# Altium PCB PCB1.PcbDoc (part 2 of 3)
Units mil, origin at the board's own origin, x right, y up, seen from the top; angles counter-clockwise.
Board outline 5410 x 4000 mil, 10 copper layers (Top Layer 1, Top Layer, Layer 5, Layer 3, Layer 1, Layer 2, Layer 4, Layer 6, Bottom Layer, Bottom Layer 1), stack 48.824 mil thick; 53 components, 189 nets, 458 pads, 144 vias.
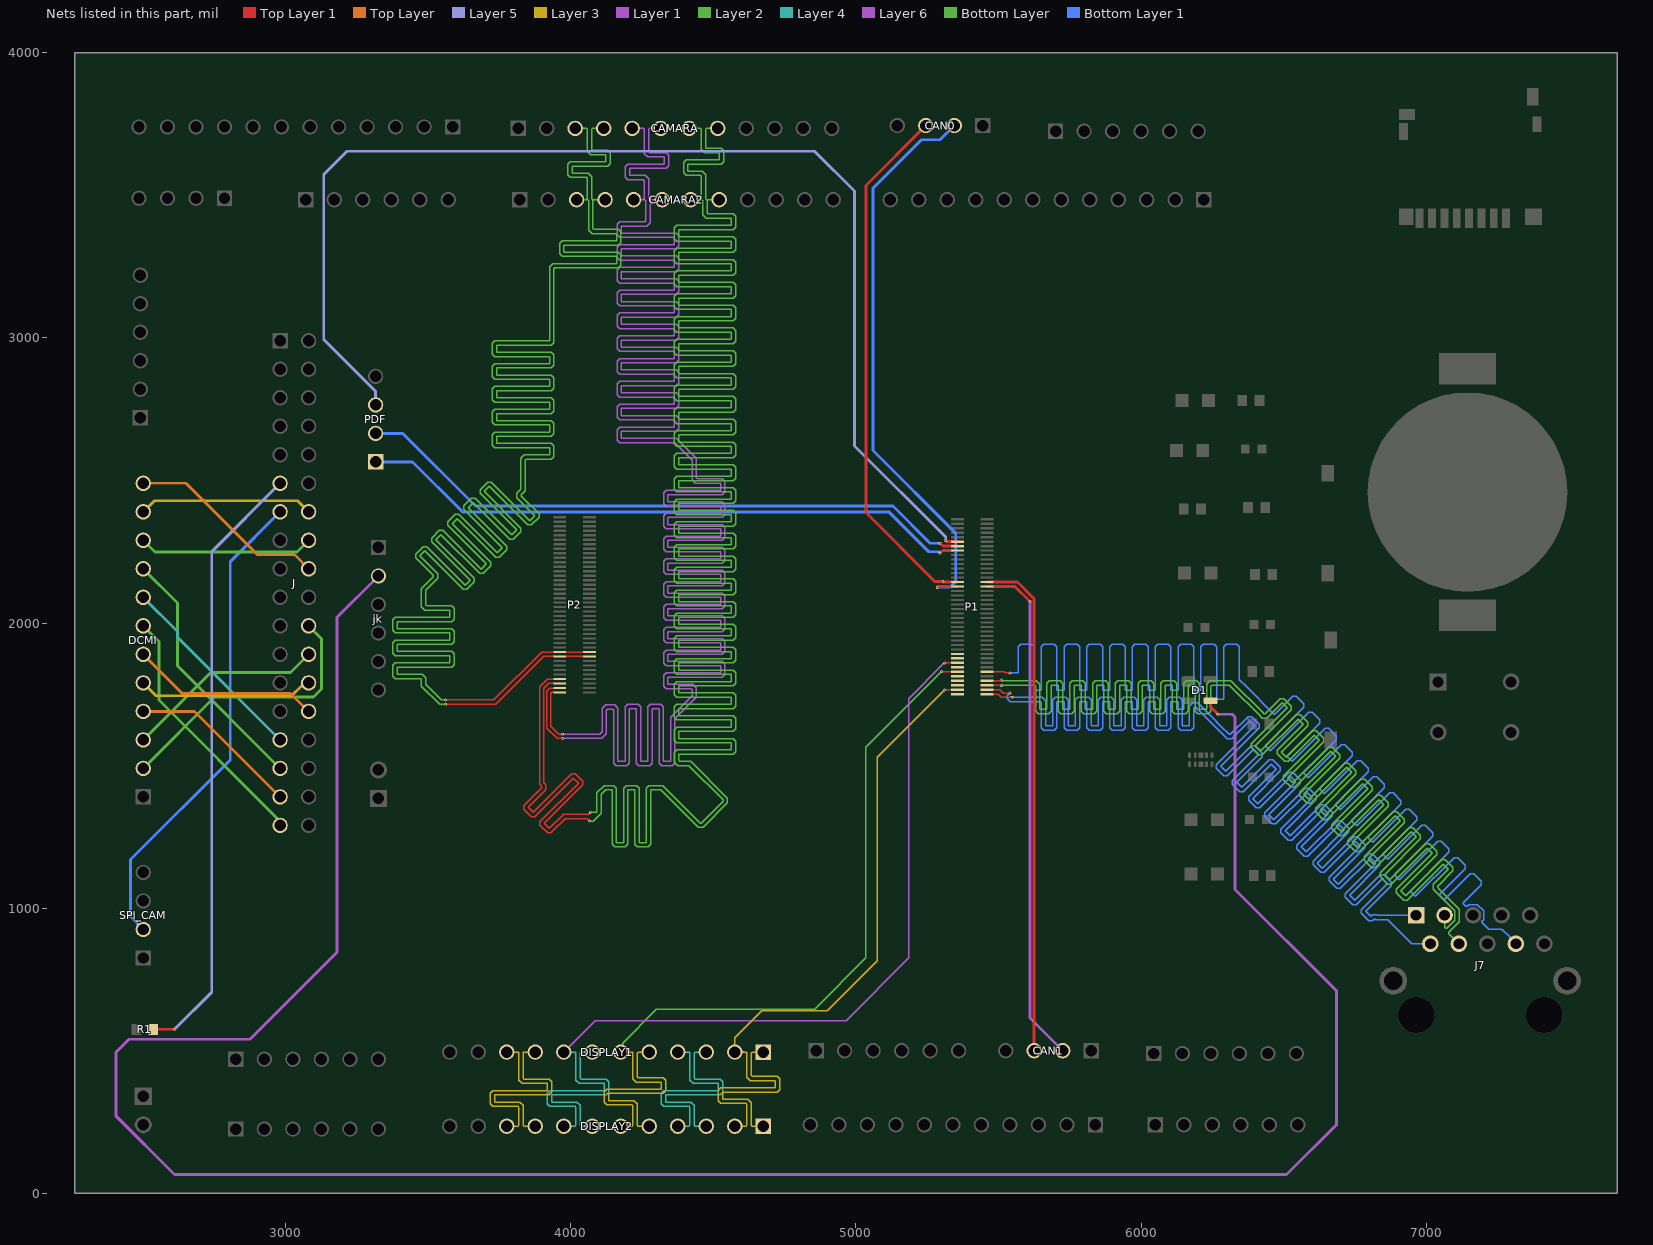
[diagram p10: the nets of this part, all layers, seen from the top]

## Via types
v1: diameter 10, hole 5, Top Layer 1 to Bottom Layer 1, 136 vias
v2: diameter 150, hole 100, Top Layer 1 to Bottom Layer 1, 4 vias
v3: diameter 50, hole 28, Top Layer 1 to Bottom Layer 1, 4 vias

## Nets (pads, with @x,y where several pads share a name; then routed paths per layer and width w, separated by ;. In a path a pad name is that pad's centre, name@x,y a point inside that pad or via, vN(x,y) a via of type N, cw(c..) or ccw(c..) an arc to the next point about the centre after c; other vN are vias at no path point) (continued)
CAM_D2_N: CAMARA2.08 CAMARA.08 P2.8 | length 14688.2
  Top Layer 1 w5: P2.8@3961.06,1803.82 3960.69,1803.44 3916.51,1803.44 3890,1776.94 3890,1433.79 3891.89,1431.89 3897.42,1426.37 3897.42,1422.23 3834.99,1359.8 3834.99,1347.37 3861.46,1320.91 3873.88,1320.91 4009.09,1456.12 4026.77,1438.44 3891.56,1303.23 3891.56,1290.81 3918.02,1264.34 3930.45,1264.34 3934.84,1268.74 3979.82,1313.71 4058.48,1313.71 4061.41,1310.78 4061.41,1309.94 4065,1306.35 v1(4065,1305)
  Layer 2 w5: v1(4065,1305) 4079,1305 4106.32,1332.32 4106.32,1398.57 4122.75,1415 4144.82,1415 4144.82,1223.79 4153.61,1215 4191.04,1215 4199.82,1223.79 4199.82,1415 4224.82,1415 4224.82,1223.79 4233.61,1215 4271.04,1215 4279.82,1223.79 4279.82,1415 4315.39,1415 4446.91,1283.48 4463.48,1283.48 4549.22,1369.22 4549.22,1385.78 4420.18,1514.82 4380.43,1514.82 4377.5,1517.75 4377.5,1539.82 4568.71,1539.82 4577.5,1548.61 4577.5,1586.04 4568.71,1594.82 4377.5,1594.82 4377.5,1619.82 4568.71,1619.82 4577.5,1628.61 4577.5,1666.04 4568.71,1674.82 4377.5,1674.82 4377.5,1699.82 4568.71,1699.82 4577.5,1708.61 4577.5,1746.04 4568.71,1754.82 4377.5,1754.82 4377.5,1779.82 4568.71,1779.82 4577.5,1788.61 4577.5,1826.04 4568.71,1834.82 4377.5,1834.82 4377.5,1859.82 4568.71,1859.82 4577.5,1868.61 4577.5,1906.04 4568.71,1914.82 4377.5,1914.82 4377.5,1939.82 4568.71,1939.82 4577.5,1948.61 4577.5,1986.04 4568.71,1994.82 4377.5,1994.82 4377.5,2019.82 4568.71,2019.82 4577.5,2028.61 4577.5,2066.04 4568.71,2074.82 4377.5,2074.82 4377.5,2099.82 4568.71,2099.82 4577.5,2108.61 4577.5,2146.04 4568.71,2154.82 4377.5,2154.82 4377.5,2179.82 4568.71,2179.82 4577.5,2188.61 4577.5,2226.04 4568.71,2234.82 4377.5,2234.82 4377.5,2259.82 4568.71,2259.82 4577.5,2268.61 4577.5,2306.04 4568.71,2314.82 4377.5,2314.82 4377.5,2339.82 4568.71,2339.82 4577.5,2348.61 4577.5,2386.04 4568.71,2394.82 4377.5,2394.82 4377.5,2419.82 4568.71,2419.82 4577.5,2428.61 4577.5,2466.04 4568.71,2474.82 4377.5,2474.82 4377.5,2499.82 4568.71,2499.82 4577.5,2508.61 4577.5,2546.04 4568.71,2554.82 4377.5,2554.82 4377.5,2579.82 4568.71,2579.82 4577.5,2588.61 4577.5,2626.04 4568.71,2634.82 4377.5,2634.82 4377.5,2659.82 4568.71,2659.82 4577.5,2668.61 4577.5,2706.04 4568.71,2714.82 4377.5,2714.82 4377.5,2739.82 4568.71,2739.82 4577.5,2748.61 4577.5,2786.04 4568.71,2794.82 4377.5,2794.82 4377.5,2819.82 4568.71,2819.82 4577.5,2828.61 4577.5,2866.04 4568.71,2874.82 4377.5,2874.82 4377.5,2899.82 4568.71,2899.82 4577.5,2908.61 4577.5,2946.04 4568.71,2954.82 4377.5,2954.82 4377.5,2979.82 4568.71,2979.82 4577.5,2988.61 4577.5,3026.04 4568.71,3034.82 4377.5,3034.82 4377.5,3059.82 4568.71,3059.82 4577.5,3068.61 4577.5,3106.04 4568.71,3114.82 4377.5,3114.82 4377.5,3139.82 4568.71,3139.82 4577.5,3148.61 4577.5,3186.04 4568.71,3194.82 4377.5,3194.82 4377.5,3219.82 4568.71,3219.82 4577.5,3228.61 4577.5,3266.04 4568.71,3274.82 4377.5,3274.82 4377.5,3299.82 4568.71,3299.82 4577.5,3308.61 4577.5,3346.04 4568.71,3354.82 4377.5,3354.82 4377.5,3379.82 4568.71,3379.82 4577.5,3388.61 4577.5,3426.04 4568.71,3434.82 4480.43,3434.82 4477.5,3437.75 4477.5,3482.07 4480.43,3485 ; CAMARA.08@4515,3735 4475.43,3735 4472.5,3732.07 4472.5,3667.75 4475.43,3664.82 4526.75,3664.82 4535.54,3656.04 4535.54,3618.61 4526.75,3609.82 4410.65,3609.82 4410.65,3584.82 4460.78,3584.82 4472.5,3573.11 4472.5,3487.93 4475.43,3485 4480.43,3485 ; CAMARA2.08@4520,3485 4480.43,3485
CAM_D2_P: CAMARA2.07 CAMARA.07 P2.6 | length 14600.2
  Top Layer 1 w5: P2.6@3961.06,1788.07 3960.69,1788.44 3922.72,1788.44 3905,1770.73 3905,1440 3912.42,1432.58 3912.42,1416.01 3849.99,1353.59 3867.67,1335.91 4002.88,1471.12 4015.3,1471.12 4041.77,1444.65 4041.77,1432.23 3906.56,1297.02 3924.24,1279.34 3969.21,1324.32 3973.61,1328.71 4061.15,1328.71 4068.04,1335.61 v1(4069.39,1335.61)
  Layer 2 w5: v1(4069.39,1335.61) 4088.39,1335.61 4091.32,1338.54 4091.32,1404.79 4116.54,1430 4151.04,1430 4159.82,1421.21 4159.82,1230 4184.82,1230 4184.82,1421.21 4193.61,1430 4231.04,1430 4239.82,1421.21 4239.82,1230 4264.82,1230 4264.82,1421.21 4273.61,1430 4321.61,1430 4453.13,1298.48 4457.27,1298.48 4534.22,1375.43 4534.22,1379.57 4413.96,1499.82 4374.22,1499.82 4362.5,1511.54 4362.5,1546.04 4371.29,1554.82 4562.5,1554.82 4562.5,1579.82 4371.29,1579.82 4362.5,1588.61 4362.5,1626.04 4371.29,1634.82 4562.5,1634.82 4562.5,1659.82 4371.29,1659.82 4362.5,1668.61 4362.5,1706.04 4371.29,1714.82 4562.5,1714.82 4562.5,1739.82 4371.29,1739.82 4362.5,1748.61 4362.5,1786.04 4371.29,1794.82 4562.5,1794.82 4562.5,1819.82 4371.29,1819.82 4362.5,1828.61 4362.5,1866.04 4371.29,1874.82 4562.5,1874.82 4562.5,1899.82 4371.29,1899.82 4362.5,1908.61 4362.5,1946.04 4371.29,1954.82 4562.5,1954.82 4562.5,1979.82 4371.29,1979.82 4362.5,1988.61 4362.5,2026.04 4371.29,2034.82 4562.5,2034.82 4562.5,2059.82 4371.29,2059.82 4362.5,2068.61 4362.5,2106.04 4371.29,2114.82 4562.5,2114.82 4562.5,2139.82 4371.29,2139.82 4362.5,2148.61 4362.5,2186.04 4371.29,2194.82 4562.5,2194.82 4562.5,2219.82 4371.29,2219.82 4362.5,2228.61 4362.5,2266.04 4371.29,2274.82 4562.5,2274.82 4562.5,2299.82 4371.29,2299.82 4362.5,2308.61 4362.5,2346.04 4371.29,2354.82 4562.5,2354.82 4562.5,2379.82 4371.29,2379.82 4362.5,2388.61 4362.5,2426.04 4371.29,2434.82 4562.5,2434.82 4562.5,2459.82 4371.29,2459.82 4362.5,2468.61 4362.5,2506.04 4371.29,2514.82 4562.5,2514.82 4562.5,2539.82 4371.29,2539.82 4362.5,2548.61 4362.5,2586.04 4371.29,2594.82 4562.5,2594.82 4562.5,2619.82 4371.29,2619.82 4362.5,2628.61 4362.5,2666.04 4371.29,2674.82 4562.5,2674.82 4562.5,2699.82 4371.29,2699.82 4362.5,2708.61 4362.5,2746.04 4371.29,2754.82 4562.5,2754.82 4562.5,2779.82 4371.29,2779.82 4362.5,2788.61 4362.5,2826.04 4371.29,2834.82 4562.5,2834.82 4562.5,2859.82 4371.29,2859.82 4362.5,2868.61 4362.5,2906.04 4371.29,2914.82 4562.5,2914.82 4562.5,2939.82 4371.29,2939.82 4362.5,2948.61 4362.5,2986.04 4371.29,2994.82 4562.5,2994.82 4562.5,3019.82 4371.29,3019.82 4362.5,3028.61 4362.5,3066.04 4371.29,3074.82 4562.5,3074.82 4562.5,3099.82 4371.29,3099.82 4362.5,3108.61 4362.5,3146.04 4371.29,3154.82 4562.5,3154.82 4562.5,3179.82 4371.29,3179.82 4362.5,3188.61 4362.5,3226.04 4371.29,3234.82 4562.5,3234.82 4562.5,3259.82 4371.29,3259.82 4362.5,3268.61 4362.5,3306.04 4371.29,3314.82 4562.5,3314.82 4562.5,3339.82 4371.29,3339.82 4362.5,3348.61 4362.5,3386.04 4371.29,3394.82 4562.5,3394.82 4562.5,3419.82 4474.22,3419.82 4462.5,3431.54 4462.5,3482.07 4459.57,3485 4454.57,3485 ; CAMARA.07@4415,3735 4454.57,3735 4457.5,3732.07 4457.5,3661.54 4469.22,3649.82 4520.54,3649.82 4520.54,3624.82 4404.43,3624.82 4395.65,3616.04 4395.65,3578.61 4404.43,3569.82 4454.57,3569.82 4457.5,3566.89 4457.5,3487.93 4454.57,3485 ; CAMARA2.07@4420,3485 4454.57,3485
CAM_D3_N: CAMARA2.06 CAMARA.06 P2.4 | length 11627.8
  Top Layer 1 w5: P2.4@3961.06,1772.32 3960.69,1771.95 3926.72,1771.95 3915,1760.23 3915,1631.29 3951.29,1595 v1(3970,1595)
  Layer 6 w5: v1(3970,1595) 4108.11,1595 4124.82,1611.72 4124.82,1694.57 4127.75,1697.5 4146.89,1697.5 4149.82,1694.57 4149.82,1508.79 4158.61,1500 4196.04,1500 4204.82,1508.79 4204.82,1700 4229.82,1700 4229.82,1508.79 4238.61,1500 4276.04,1500 4284.82,1508.79 4284.82,1700 4309.82,1700 4309.82,1508.79 4318.61,1500 4356.04,1500 4364.82,1508.79 4364.82,1663.61 4440,1738.79 4440,1773.46 4428.28,1785.18 4340,1785.18 4340,1810.18 4531.21,1810.18 4540,1818.96 4540,1856.39 4531.21,1865.18 4340,1865.18 4340,1890.18 4531.21,1890.18 4540,1898.96 4540,1936.39 4531.21,1945.18 4340,1945.18 4340,1970.18 4531.21,1970.18 4540,1978.96 4540,2016.39 4531.21,2025.18 4340,2025.18 4340,2050.18 4531.21,2050.18 4540,2058.96 4540,2096.39 4531.21,2105.18 4340,2105.18 4340,2130.18 4531.21,2130.18 4540,2138.96 4540,2176.39 4531.21,2185.18 4340,2185.18 4340,2210.18 4531.21,2210.18 4540,2218.96 4540,2256.39 4531.21,2265.18 4340,2265.18 4340,2290.18 4531.21,2290.18 4540,2298.96 4540,2336.39 4531.21,2345.18 4340,2345.18 4340,2370.18 4531.21,2370.18 4540,2378.96 4540,2416.39 4531.21,2425.18 4340,2425.18 4340,2450.18 4531.21,2450.18 4540,2458.96 4540,2496.39 4531.21,2505.18 4442.93,2505.18 4440,2508.11 4440,2577.5 4370,2647.5 4177.5,2647.5 4177.5,2672.5 4368.71,2672.5 4377.5,2681.29 4377.5,2718.71 4368.71,2727.5 4177.5,2727.5 4177.5,2752.5 4368.71,2752.5 4377.5,2761.29 4377.5,2798.71 4368.71,2807.5 4177.5,2807.5 4177.5,2832.5 4368.71,2832.5 4377.5,2841.29 4377.5,2878.71 4368.71,2887.5 4177.5,2887.5 4177.5,2912.5 4368.71,2912.5 4377.5,2921.29 4377.5,2958.71 4368.71,2967.5 4177.5,2967.5 4177.5,2992.5 4368.71,2992.5 4377.5,3001.29 4377.5,3038.71 4368.71,3047.5 4177.5,3047.5 4177.5,3072.5 4368.71,3072.5 4377.5,3081.29 4377.5,3118.71 4368.71,3127.5 4177.5,3127.5 4177.5,3152.5 4368.71,3152.5 4377.5,3161.29 4377.5,3198.71 4368.71,3207.5 4177.5,3207.5 4177.5,3232.5 4368.71,3232.5 4377.5,3241.29 4377.5,3278.71 4368.71,3287.5 4177.5,3287.5 4177.5,3312.5 4368.71,3312.5 4377.5,3321.29 4377.5,3358.71 4368.71,3367.5 4177.5,3367.5 4177.5,3392.5 4265.78,3392.5 4277.5,3404.21 4277.5,3482.07 4278.96,3483.53 4280.43,3485 ; CAMARA.06@4315,3735 4275.43,3735 4272.5,3732.07 4272.5,3652.75 4275.43,3649.82 4333.7,3649.82 4342.49,3641.04 4342.49,3603.61 4333.7,3594.82 4206.25,3594.82 4206.25,3569.82 4260.78,3569.82 4272.5,3558.11 4272.5,3490 4277.5,3485 4280.43,3485 ; CAMARA2.06@4320,3485 4280.43,3485
CAM_D3_P: CAMARA2.05 CAMARA.05 P2.2 | length 11550.4
  Top Layer 1 w5: P2.2@3961.06,1756.57 3960.69,1756.95 3932.93,1756.95 3930,1754.02 3930,1637.5 3957.5,1610 v1(3970,1610)
  Layer 6 w5: v1(3970,1610) 4101.89,1610 4109.82,1617.93 4109.82,1700.78 4121.54,1712.5 4153.11,1712.5 4164.82,1700.78 4164.82,1515 4189.82,1515 4189.82,1706.21 4198.61,1715 4236.04,1715 4244.82,1706.21 4244.82,1515 4269.82,1515 4269.82,1706.21 4278.61,1715 4316.04,1715 4324.82,1706.21 4324.82,1515 4349.82,1515 4349.82,1669.82 4425,1745 4425,1767.25 4422.07,1770.18 4333.79,1770.18 4325,1778.96 4325,1816.39 4333.79,1825.18 4525,1825.18 4525,1850.18 4333.79,1850.18 4325,1858.96 4325,1896.39 4333.79,1905.18 4525,1905.18 4525,1930.18 4333.79,1930.18 4325,1938.96 4325,1976.39 4333.79,1985.18 4525,1985.18 4525,2010.18 4333.79,2010.18 4325,2018.96 4325,2056.39 4333.79,2065.18 4525,2065.18 4525,2090.18 4333.79,2090.18 4325,2098.96 4325,2136.39 4333.79,2145.18 4525,2145.18 4525,2170.18 4333.79,2170.18 4325,2178.96 4325,2216.39 4333.79,2225.18 4525,2225.18 4525,2250.18 4333.79,2250.18 4325,2258.96 4325,2296.39 4333.79,2305.18 4525,2305.18 4525,2330.18 4333.79,2330.18 4325,2338.96 4325,2376.39 4333.79,2385.18 4525,2385.18 4525,2410.18 4333.79,2410.18 4325,2418.96 4325,2456.39 4333.79,2465.18 4525,2465.18 4525,2490.18 4436.72,2490.18 4425,2501.89 4425,2571.29 4363.79,2632.5 4171.29,2632.5 4162.5,2641.29 4162.5,2678.71 4171.29,2687.5 4362.5,2687.5 4362.5,2712.5 4171.29,2712.5 4162.5,2721.29 4162.5,2758.71 4171.29,2767.5 4362.5,2767.5 4362.5,2792.5 4171.29,2792.5 4162.5,2801.29 4162.5,2838.71 4171.29,2847.5 4362.5,2847.5 4362.5,2872.5 4171.29,2872.5 4162.5,2881.29 4162.5,2918.71 4171.29,2927.5 4362.5,2927.5 4362.5,2952.5 4171.29,2952.5 4162.5,2961.29 4162.5,2998.71 4171.29,3007.5 4362.5,3007.5 4362.5,3032.5 4171.29,3032.5 4162.5,3041.29 4162.5,3078.71 4171.29,3087.5 4362.5,3087.5 4362.5,3112.5 4171.29,3112.5 4162.5,3121.29 4162.5,3158.71 4171.29,3167.5 4362.5,3167.5 4362.5,3192.5 4171.29,3192.5 4162.5,3201.29 4162.5,3238.71 4171.29,3247.5 4362.5,3247.5 4362.5,3272.5 4171.29,3272.5 4162.5,3281.29 4162.5,3318.71 4171.29,3327.5 4362.5,3327.5 4362.5,3352.5 4171.29,3352.5 4162.5,3361.29 4162.5,3398.71 4171.29,3407.5 4259.57,3407.5 4262.5,3410.43 4262.5,3482.07 4259.57,3485 4252.5,3485 ; CAMARA.05@4215,3735 4254.57,3735 4257.5,3732.07 4257.5,3646.54 4269.22,3634.82 4327.49,3634.82 4327.49,3609.82 4200.04,3609.82 4191.25,3601.04 4191.25,3563.61 4200.04,3554.82 4254.57,3554.82 4257.5,3551.89 4257.5,3490 4252.5,3485 ; CAMARA2.05@4220,3485 4252.5,3485
CAN0_RX: CAN0.03 P1.52 | length 1866.5
  Top Layer 1 w10: CAN0.03@5245,3745 5035,3535 5035,2387.57 5277.57,2145 v1(5305,2145) 5306.3,2143.7 P1.52@5356.06,2143.7
CAN0_TX: CAN0.02 P1.50 | length 2021.3
  Top Layer 1 w10: v1(5285,2125) 5287.95,2127.95 P1.50@5356.06,2127.95
  Bottom Layer 1 w10: v1(5285,2125) 5286.46,2126.46 5330.6,2126.46 5350,2145.86 5350,2315 5060,2605 5060,3525 5230,3695 5295,3695 CAN0.02@5345,3745
CAN1_RX: CAN1.03 P1.51 | length 1774.3
  Top Layer 1 w10: P1.51@5460,2143.7 5566.3,2143.7 5625,2085 CAN1.03@5625,500
CAN1_TX: CAN1.02 P1.49 | length 1794.6
  Top Layer 1 w10: P1.49@5460,2127.95 5557.05,2127.95 v1(5610,2075)
  Layer 1 w10: v1(5610,2075) 5610,615 CAN1.02@5725,500
CK: P1.66 PDF.01 | length 2177.3
  Top Layer 1 w10: v1(5295,2245) 5303.94,2253.94 P1.66@5356.06,2253.94
  Bottom Layer 1 w10: PDF.01@3315,2565 3445,2565 3620,2390 5115,2390 5255,2250 5290,2250 v1(5295,2245)
CK_N: CAMARA2.04 CAMARA.04 P2.19 P2.20 | length 8928.6
  Top Layer 1 w5: v1(3560,1730) 3729.82,1730 3897.75,1897.93 4064.63,1897.93 P2.19@4065,1898.31
  Layer 2 w5: v1(3560,1730) 3545.86,1730 3490.61,1785.25 3490.61,1808.46 3478.89,1820.18 3390.61,1820.18 3390.61,1845.18 3581.82,1845.18 3590.61,1853.96 3590.61,1891.39 3581.82,1900.18 3390.61,1900.18 3390.61,1925.18 3581.82,1925.18 3590.61,1933.96 3590.61,1971.39 3581.82,1980.18 3390.61,1980.18 3390.61,2005.18 3581.82,2005.18 3590.61,2013.96 3590.61,2051.39 3581.82,2060.18 3493.54,2060.18 3490.61,2063.11 3490.61,2114.39 3532.53,2156.32 3532.53,2172.89 3470.11,2235.32 3487.79,2252.99 3622.99,2117.79 3635.42,2117.79 3661.88,2144.25 3661.88,2156.68 3526.68,2291.88 3544.35,2309.56 3679.56,2174.35 3691.99,2174.35 3718.45,2200.82 3718.45,2213.24 3583.24,2348.45 3600.92,2366.13 3736.13,2230.92 3748.56,2230.92 3775.02,2257.39 3775.02,2269.81 3639.81,2405.02 3657.49,2422.7 3785.9,2294.29 3798.33,2294.29 3824.79,2320.75 3824.79,2333.18 3696.38,2461.59 3714.06,2479.27 3849.27,2344.06 3861.69,2344.06 3888.16,2370.52 3888.16,2382.95 3825.73,2445.38 3825.73,2449.52 3830.61,2454.39 3840,2463.79 3840,2571.89 3842.93,2574.82 3931.21,2574.82 3940,2583.61 3940,2621.04 3931.21,2629.82 3740,2629.82 3740,2654.82 3931.21,2654.82 3940,2663.61 3940,2701.04 3931.21,2709.82 3740,2709.82 3740,2734.82 3931.21,2734.82 3940,2743.61 3940,2781.04 3931.21,2789.82 3740,2789.82 3740,2814.82 3931.21,2814.82 3940,2823.61 3940,2861.04 3931.21,2869.82 3740,2869.82 3740,2894.82 3931.21,2894.82 3940,2903.61 3940,2941.04 3931.21,2949.82 3740,2949.82 3740,2974.82 3931.21,2974.82 3940,2983.61 3940,3242.84 3942.93,3245.77 4166.52,3245.77 4175.3,3254.56 4175.3,3291.98 4166.52,3300.77 3975.3,3300.77 3975.3,3325.77 4166.52,3325.77 4175.3,3334.56 4175.3,3371.98 4166.52,3380.77 4080.43,3380.77 4077.5,3383.7 4077.5,3482.07 4078.96,3483.53 4080.43,3485 ; CAMARA.04@4115,3735 4075.43,3735 4072.5,3732.07 4072.5,3675 4072.5,3660.86 4075.43,3657.93 4128.82,3657.93 4137.61,3649.14 4137.61,3611.72 4128.82,3602.93 4003.9,3602.93 4003.9,3577.93 4060.78,3577.93 4072.5,3566.21 4072.5,3553.11 4072.5,3490 4077.5,3485 4080.43,3485 ; CAMARA2.04@4120,3485 4080.43,3485
CK_OMV: J.13 SPI_CAM.02 | length 1701.1
  Bottom Layer 1 w10: SPI_CAM.02@2500,925 2455,970 2455,1170 2805,1520 2805,2215 J.13@2980,2390
CK_P: CAMARA2.03 CAMARA.03 P2.17 P2.18 | length 8950.5
  Top Layer 1 w5: v1(3560,1715) 3736.03,1715 3903.97,1882.93 4064.63,1882.93 P2.17@4065,1882.56
  Layer 2 w5: v1(3560,1715) 3539.64,1715 3475.61,1779.04 3475.61,1802.25 3472.68,1805.18 3384.39,1805.18 3375.61,1813.96 3375.61,1851.39 3384.39,1860.18 3575.61,1860.18 3575.61,1885.18 3384.39,1885.18 3375.61,1893.96 3375.61,1931.39 3384.39,1940.18 3575.61,1940.18 3575.61,1965.18 3384.39,1965.18 3375.61,1973.96 3375.61,2011.39 3384.39,2020.18 3575.61,2020.18 3575.61,2045.18 3487.32,2045.18 3475.61,2056.89 3475.61,2120.61 3517.53,2162.53 3517.53,2166.68 3455.11,2229.1 3455.11,2241.53 3481.57,2267.99 3494,2267.99 3629.21,2132.79 3646.88,2150.46 3511.68,2285.67 3511.68,2298.1 3538.14,2324.56 3550.57,2324.56 3685.78,2189.35 3703.45,2207.03 3568.24,2342.24 3568.24,2354.67 3594.71,2381.13 3607.14,2381.13 3742.34,2245.92 3760.02,2263.6 3624.81,2398.81 3624.81,2411.23 3651.28,2437.7 3663.7,2437.7 3792.11,2309.29 3809.79,2326.97 3681.38,2455.38 3681.38,2467.8 3707.85,2494.27 3720.27,2494.27 3855.48,2359.06 3873.16,2376.74 3810.73,2439.16 3810.73,2455.73 3825,2470 3825,2578.11 3836.72,2589.82 3925,2589.82 3925,2614.82 3733.79,2614.82 3725,2623.61 3725,2661.04 3733.79,2669.82 3925,2669.82 3925,2694.82 3733.79,2694.82 3725,2703.61 3725,2741.04 3733.79,2749.82 3925,2749.82 3925,2774.82 3733.79,2774.82 3725,2783.61 3725,2821.04 3733.79,2829.82 3925,2829.82 3925,2854.82 3733.79,2854.82 3725,2863.61 3725,2901.04 3733.79,2909.82 3925,2909.82 3925,2934.82 3733.79,2934.82 3725,2943.61 3725,2981.04 3733.79,2989.82 3925,2989.82 3925,3249.05 3936.72,3260.77 4160.3,3260.77 4160.3,3285.77 3969.09,3285.77 3960.3,3294.56 3960.3,3331.98 3969.09,3340.77 4160.3,3340.77 4160.3,3365.77 4074.22,3365.77 4062.5,3377.48 4062.5,3482.07 4059.57,3485 4052.5,3485 ; CAMARA.03@4015,3735 4054.57,3735 4057.5,3732.07 4057.5,3675 4057.5,3654.65 4069.22,3642.93 4122.61,3642.93 4122.61,3617.93 3997.69,3617.93 3988.9,3609.14 3988.9,3571.72 3997.69,3562.93 4054.57,3562.93 4057.5,3560 4057.5,3553.11 4057.5,3490 4052.5,3485 ; CAMARA2.03@4020,3485 4052.5,3485
CS_OMV: J.11 R1.2 | length 2143.1
  Top Layer 1 w10: R1.2@2535.12,575 v1(2610,575)
  Layer 5 w10: v1(2610,575) 2740,705 2740,2250 J.11@2980,2490
D0: P1.68 PDF.02 | length 2204.8
  Top Layer 1 w10: v1(5295,2280) 5305.31,2269.69 P1.68@5356.06,2269.69
  Bottom Layer 1 w10: PDF.02@3315,2665 3410,2665 3665,2410 5129.6,2410 5259.6,2280 v1(5295,2280)
D1: P1.70 PDF.03 | length 4237.8
  Top Layer 1 w10: v1(5315,2290) 5318.62,2286.38 5355.12,2286.38 P1.70@5356.06,2285.43
  Layer 5 w10: PDF.03@3315,2765 3315,2812.72 3133.03,2994.69 3133.03,3573.03 3215,3655 4855,3655 4995,3515 4995,2621.21 5315,2301.21 v1(5315,2290)
D_N: D1.3 jk.02 | length 8662.2
  Top Layer 1 w10: D1.3@6243.58,1727.6 6243.58,1706.42 v1(6270,1680)
  Layer 6 w10: jk.02@3325,2165 3180,2020 3180,845 2875,540 2450,540 2405,495 2405,270 2610,65 6510,65 6685,240 6685,710 6330,1065 6330,1670 6320,1680 v1(6270,1680)
DCMI_D0: DCMI.09 J.31 | length 898.8
  Bottom Layer w10: DCMI.09@2500,2190 2620,2070 2620,1850 J.31@2980,1490
DCMI_D1: DCMI.08 J.29 | length 698.8
  Layer 4 w10: DCMI.08@2500,2090 2620,1970 2620,1950 J.29@2980,1590
DCMI_D2: DCMI.07 J.35 | length 898.8
  Bottom Layer w10: DCMI.07@2500,1990 2555,1935 2555,1730 2967.82,1317.18 2967.82,1314.07 2980,1301.89 J.35@2980,1290
DCMI_D3: DCMI.06 J.28 | length 662.8
  Top Layer w10: DCMI.06@2500,1890 2637,1753 3017,1753 J.28@3080,1690
DCMI_D4: DCMI.05 J.26 | length 617.3
  Layer 3 w10: DCMI.05@2500,1790 2545,1745 3020,1745 3052.82,1777.82 3055.93,1777.82 3068.11,1790 J.26@3080,1790
DCMI_D5: DCMI.04 J.33 | length 604.3
  Top Layer w10: DCMI.04@2500,1690 2680,1690 J.33@2980,1390
DCMI_D6: DCMI.03 J.24 | length 704.3
  Layer 2 w10: DCMI.03@2500,1590 2737,1827 3017,1827 J.24@3080,1890
DCMI_D7: DCMI.02 J.22 | length 980.8
  Layer 2 w10: DCMI.02@2500,1490 2750,1740 3097,1740 3125,1768 3125,1945 J.22@3080,1990
DCMI_HS: DCMI.12 J.18 | length 704.3
  Top Layer w10: DCMI.12@2500,2490 2650,2490 2900,2240 3030,2240 J.18@3080,2190
DCMI_PCLK: DCMI.11 J.14 | length 612.3
  Layer 3 w10: DCMI.11@2500,2390 2539,2429 3041,2429 J.14@3080,2390
DCMI_VS: DCMI.10 J.16 | length 614
  Layer 2 w10: DCMI.10@2500,2290 2541,2249 3039,2249 J.16@3080,2290
DS1_CK_N: P1.20
DS1_CK_P: P1.18
DS1_D0_P: P1.14
DS1_D1_P: P1.10
DS1_D2_N: P1.8
DS1_D2_P: P1.6
DS1_D3_P: P1.2
DSI_CK_N: DISPLAY1.10 DISPLAY2.10 | length 722.7
  Layer 3 w5: DISPLAY2.10@3775,235 3814.57,235 3817.5,237.93 3817.5,295 3817.5,301.89 3814.57,304.82 3726.29,304.82 3717.5,313.61 3717.5,351.04 3726.29,359.82 3917.5,359.82 3917.5,384.82 3829.22,384.82 3817.5,396.54 3817.5,435 3817.5,492.07 3814.57,495 DISPLAY1.10@3775,495
DSI_CK_P: DISPLAY1.09 DISPLAY2.09 | length 722.7
  Layer 3 w5: DISPLAY2.09@3875,235 3835.43,235 3832.5,237.93 3832.5,295 3832.5,308.11 3820.78,319.82 3732.5,319.82 3732.5,344.82 3923.71,344.82 3932.5,353.61 3932.5,391.04 3923.71,399.82 3835.43,399.82 3832.5,402.75 3832.5,435 3832.5,492.07 3835.43,495 DISPLAY1.09@3875,495
DSI_D0_N: DISPLAY1.08 DISPLAY2.08 P1.16 | length 3202.3
  Top Layer 1 w5: v1(5310,1860) 5310.12,1860.12 5355.94,1860.12 P1.16@5356.06,1860.24
  Layer 4 w5: DISPLAY2.08@3975,235 4014.57,235 4017.5,237.93 4017.5,295 4017.5,301.89 4014.57,304.82 3926.29,304.82 3917.5,313.61 3917.5,351.04 3926.29,359.82 4117.5,359.82 4117.5,384.82 4029.22,384.82 4017.5,396.54 4017.5,435 4017.5,492.07 4014.57,495 DISPLAY1.08@3975,495
  Layer 6 w5: DISPLAY1.08@3975,495 4085,605 4965,605 5185,825 5185,1735 v1(5310,1860)
DSI_D0_P: DISPLAY1.07 DISPLAY2.07 | length 722.7
  Layer 4 w5: DISPLAY2.07@4075,235 4035.43,235 4032.5,237.93 4032.5,295 4032.5,308.11 4020.78,319.82 3932.5,319.82 3932.5,344.82 4123.71,344.82 4132.5,353.61 4132.5,391.04 4123.71,399.82 4035.43,399.82 4032.5,402.75 4032.5,435 4032.5,492.07 4035.43,495 DISPLAY1.07@4075,495
DSI_D1_N: DISPLAY1.06 DISPLAY2.06 P1.12 | length 2905.4
  Top Layer 1 w5: v1(5300,1830) 5300.63,1829.37 5355.43,1829.37 P1.12@5356.06,1828.74
  Layer 3 w5: DISPLAY2.06@4175,235 4214.57,235 4217.5,237.93 4217.5,300 4217.5,306.89 4214.57,309.82 4126.29,309.82 4117.5,318.61 4117.5,356.04 4126.29,364.82 4317.5,364.82 4317.5,389.82 4229.22,389.82 4217.5,401.54 4217.5,435 4217.5,492.07 4214.57,495 DISPLAY1.06@4175,495
  Bottom Layer w5: DISPLAY1.06@4175,495 4181.54,501.54 4181.54,526.54 4300,645 4855,645 5035,825 5035,1565 v1(5300,1830)
DSI_D1_P: DISPLAY1.05 DISPLAY2.05 | length 722.7
  Layer 3 w5: DISPLAY2.05@4275,235 4235.43,235 4232.5,237.93 4232.5,300 4232.5,313.11 4220.78,324.82 4132.5,324.82 4132.5,349.82 4323.71,349.82 4332.5,358.61 4332.5,396.04 4323.71,404.82 4235.43,404.82 4232.5,407.75 4232.5,435 4232.5,492.07 4235.43,495 DISPLAY1.05@4275,495
DSI_D2_N: DISPLAY1.04 DISPLAY2.04 | length 722.7
  Layer 4 w5: DISPLAY2.04@4375,235 4414.57,235 4417.5,237.93 4417.5,295 4417.5,301.89 4414.57,304.82 4326.29,304.82 4317.5,313.61 4317.5,351.04 4326.29,359.82 4517.5,359.82 4517.5,384.82 4429.22,384.82 4417.5,396.54 4417.5,435 4417.5,492.07 4414.57,495 DISPLAY1.04@4375,495
DSI_D2_P: DISPLAY1.03 DISPLAY2.03 | length 722.7
  Layer 4 w5: DISPLAY2.03@4475,235 4435.43,235 4432.5,237.93 4432.5,295 4432.5,308.11 4420.78,319.82 4332.5,319.82 4332.5,344.82 4523.71,344.82 4532.5,353.61 4532.5,391.04 4523.71,399.82 4435.43,399.82 4432.5,402.75 4432.5,435 4432.5,492.07 4435.43,495 DISPLAY1.03@4475,495
DSI_D3_N: DISPLAY1.02 DISPLAY2.02 P1.4 | length 2510.4
  Top Layer 1 w5: v1(5310,1765) 5310.37,1765.37 5355.69,1765.37 P1.4@5356.06,1765.75
  Layer 5 w5: DISPLAY1.02@4575,495 4576.54,496.54 4606.54,496.54
  Layer 3 w5: DISPLAY2.02@4575,235 4614.57,235 4617.5,237.93 4617.5,305 4617.5,311.89 4614.57,314.82 4526.29,314.82 4517.5,323.61 4517.5,361.04 4526.29,369.82 4717.5,369.82 4717.5,394.82 4629.22,394.82 4617.5,406.54 4617.5,440 4617.5,492.07 4614.57,495 DISPLAY1.02@4575,495 4575,545 4670,640 4900,640 5075,815 5075,1530 v1(5310,1765)
DSI_D3_P: DISPLAY1.01 DISPLAY2.01 | length 722.7
  Layer 3 w5: DISPLAY2.01@4675,235 4635.43,235 4632.5,237.93 4632.5,305 4632.5,318.11 4620.78,329.82 4532.5,329.82 4532.5,354.82 4723.71,354.82 4732.5,363.61 4732.5,401.04 4723.71,409.82 4635.43,409.82 4632.5,412.75 4632.5,440 4632.5,492.07 4635.43,495 DISPLAY1.01@4675,495
ETH_A_N: J7.2 P1.3 | length 6286.4
  Top Layer 1 w5: P1.3@5460,1765.75 5460.37,1765.37 5505.14,1765.37 5516.16,1754.36 5539.36,1754.36 v1(5540,1755)
  Bottom Layer 1 w5: v1(5540,1755) 5530,1745 5530,1736.03 5531.86,1734.18 5531.86,1733.14 5540.64,1724.36 5600,1724.36 5646.89,1724.36 5649.82,1721.43 5649.82,1633.14 5658.61,1624.36 5696.04,1624.36 5704.82,1633.14 5704.82,1724.36 5729.82,1724.36 5729.82,1633.14 5738.61,1624.36 5776.04,1624.36 5784.82,1633.14 5784.82,1724.36 5809.82,1724.36 5809.82,1633.14 5818.61,1624.36 5856.04,1624.36 5864.82,1633.14 5864.82,1724.36 5889.82,1724.36 5889.82,1633.14 5898.61,1624.36 5936.04,1624.36 5944.82,1633.14 5944.82,1724.36 5969.82,1724.36 5969.82,1633.14 5978.61,1624.36 6016.04,1624.36 6024.82,1633.14 6024.82,1724.36 6049.82,1724.36 6049.82,1633.14 6058.61,1624.36 6096.04,1624.36 6104.82,1633.14 6104.82,1724.36 6129.82,1724.36 6129.82,1633.14 6138.61,1624.36 6176.04,1624.36 6184.82,1633.14 6184.82,1701.64 6187.75,1704.57 6191.89,1704.57 6235,1661.46 6280.73,1615.73 6285.61,1610.86 6302.32,1594.15 6318.89,1594.15 6381.31,1656.57 6398.99,1638.9 6263.78,1503.69 6263.78,1491.26 6290.25,1464.8 6302.67,1464.8 6393.05,1555.17 6410.73,1537.5 6320.35,1447.12 6320.35,1434.69 6346.81,1408.23 6359.24,1408.23 6456.06,1505.05 6473.74,1487.37 6376.92,1390.55 6376.92,1378.12 6403.38,1351.66 6415.81,1351.66 6525.65,1461.51 6543.33,1443.83 6433.49,1333.98 6433.49,1321.56 6459.95,1295.09 6472.38,1295.09 6582.22,1404.94 6599.9,1387.26 6490.06,1277.41 6490.06,1264.99 6516.52,1238.52 6528.95,1238.52 6638.79,1348.37 6656.47,1330.69 6546.62,1220.85 6546.62,1208.42 6573.09,1181.95 6585.51,1181.95 6695.36,1291.8 6713.04,1274.12 6603.19,1164.28 6603.19,1151.85 6629.66,1125.39 6642.08,1125.39 6751.93,1235.23 6769.61,1217.55 6659.76,1107.71 6659.76,1095.28 6686.23,1068.82 6698.65,1068.82 6805.39,1175.56 6823.07,1157.88 6716.33,1051.14 6716.33,1038.71 6742.79,1012.25 6755.22,1012.25 6845.6,1102.63 6863.28,1084.95 6772.9,994.57 6772.9,982.15 6799.36,955.68 6811.79,955.68 6817.27,961.16 6821.41,961.16 6822.57,960 6830,960 6865,960 6950,875 J7.2@7014.58,875
ETH_A_P: J7.1 P1.1 | length 6162.4
  Top Layer 1 w5: P1.1@5460,1750 5460.37,1750.37 5498.93,1750.37 5509.95,1739.36 v1(5546.86,1739.36)
  Bottom Layer 1 w5: v1(5546.86,1739.36) 5600,1739.36 5653.11,1739.36 5664.82,1727.64 5664.82,1639.36 5689.82,1639.36 5689.82,1730.57 5698.61,1739.36 5736.04,1739.36 5744.82,1730.57 5744.82,1639.36 5769.82,1639.36 5769.82,1730.57 5778.61,1739.36 5816.04,1739.36 5824.82,1730.57 5824.82,1639.36 5849.82,1639.36 5849.82,1730.57 5858.61,1739.36 5896.04,1739.36 5904.82,1730.57 5904.82,1639.36 5929.82,1639.36 5929.82,1730.57 5938.61,1739.36 5976.04,1739.36 5984.82,1730.57 5984.82,1639.36 6009.82,1639.36 6009.82,1730.57 6018.61,1739.36 6056.04,1739.36 6064.82,1730.57 6064.82,1639.36 6089.82,1639.36 6089.82,1730.57 6098.61,1739.36 6136.04,1739.36 6144.82,1730.57 6144.82,1639.36 6169.82,1639.36 6169.82,1707.86 6181.54,1719.57 6198.11,1719.57 6235,1682.68 6291.34,1626.34 6296.21,1621.46 6308.53,1609.15 6312.67,1609.15 6375.1,1671.57 6387.52,1671.57 6413.99,1645.11 6413.99,1632.68 6278.78,1497.48 6296.46,1479.8 6386.84,1570.17 6399.26,1570.17 6425.73,1543.71 6425.73,1531.28 6335.35,1440.91 6353.03,1423.23 6449.85,1520.05 6462.27,1520.05 6488.74,1493.58 6488.74,1481.16 6391.92,1384.34 6409.6,1366.66 6519.44,1476.51 6531.87,1476.51 6558.33,1450.04 6558.33,1437.62 6448.49,1327.77 6466.16,1310.09 6576.01,1419.94 6588.44,1419.94 6614.9,1393.47 6614.9,1381.05 6505.06,1271.2 6522.73,1253.52 6632.58,1363.37 6645,1363.37 6671.47,1336.9 6671.47,1324.48 6561.62,1214.63 6579.3,1196.95 6689.15,1306.8 6701.57,1306.8 6728.04,1280.34 6728.04,1267.91 6618.19,1158.06 6635.87,1140.39 6745.72,1250.23 6758.14,1250.23 6784.61,1223.77 6784.61,1211.34 6674.76,1101.5 6692.44,1083.82 6799.18,1190.56 6811.6,1190.56 6838.07,1164.09 6838.07,1151.67 6731.33,1044.93 6749.01,1027.25 6839.38,1117.63 6851.81,1117.63 6878.28,1091.16 6878.28,1078.74 6787.9,988.36 6805.58,970.68 6811.06,976.16 6827.63,976.16 6828.79,975 6845,975 J7.1@6964.58,975
ETH_B_N: J7.4 P1.7 | length 7359.1
  Top Layer 1 w5: P1.7@5460,1797.24 5460.37,1796.87 v1@5510,1796.87
  Layer 2 w5: v1(5510,1800) 5511.35,1800 5513.85,1797.5 5580,1797.5 5633.11,1797.5 5644.82,1785.78 5644.82,1697.5 5669.82,1697.5 5669.82,1788.71 5678.61,1797.5 5716.04,1797.5 5724.82,1788.71 5724.82,1697.5 5749.82,1697.5 5749.82,1788.71 5758.61,1797.5 5796.04,1797.5 5804.82,1788.71 5804.82,1697.5 5829.82,1697.5 5829.82,1788.71 5838.61,1797.5 5876.04,1797.5 5884.82,1788.71 5884.82,1697.5 5909.82,1697.5 5909.82,1788.71 5918.61,1797.5 5956.04,1797.5 5964.82,1788.71 5964.82,1697.5 5989.82,1697.5 5989.82,1788.71 5998.61,1797.5 6036.04,1797.5 6044.82,1788.71 6044.82,1697.5 6069.82,1697.5 6069.82,1788.71 6078.61,1797.5 6116.04,1797.5 6124.82,1788.71 6124.82,1697.5 6149.82,1697.5 6149.82,1788.71 6158.61,1797.5 6196.04,1797.5 6204.82,1788.71 6204.82,1697.5 6229.82,1697.5 6229.82,1785.78 6241.54,1797.5 6315.04,1797.5 6320,1792.54 6426.27,1686.27 6431.15,1681.4 6435.29,1681.4 6488.62,1734.72 6501.04,1734.72 6527.51,1708.26 6527.51,1695.83 6401.4,1569.72 6419.08,1552.05 6545.18,1678.16 6557.61,1678.16 6584.08,1651.69 6584.08,1639.27 6491.85,1547.04 6509.53,1529.36 6601.75,1621.59 6614.18,1621.59 6640.64,1595.12 6640.64,1582.7 6514.53,1456.59 6532.21,1438.91 6658.32,1565.02 6670.75,1565.02 6697.21,1538.56 6697.21,1526.13 6571.1,1400.02 6588.78,1382.34 6714.89,1508.45 6727.32,1508.45 6753.78,1481.99 6753.78,1469.56 6627.67,1343.45 6645.35,1325.77 6771.46,1451.88 6783.88,1451.88 6810.35,1425.42 6810.35,1412.99 6684.24,1286.88 6701.92,1269.21 6828.03,1395.31 6840.45,1395.31 6866.92,1368.85 6866.92,1356.42 6740.81,1230.31 6758.49,1212.64 6884.6,1338.75 6897.02,1338.75 6923.49,1312.28 6923.49,1299.86 6797.38,1173.75 6815.05,1156.07 6941.16,1282.18 6953.59,1282.18 6980.05,1255.71 6980.05,1243.29 6853.94,1117.18 6871.62,1099.5 6997.73,1225.61 7010.16,1225.61 7036.62,1199.14 7036.62,1186.72 6910.51,1060.61 6928.19,1042.93 7054.3,1169.04 7066.73,1169.04 7093.19,1142.58 7093.19,1130.15 7039.86,1076.82 7039.86,1072.68 7046.4,1066.15 7051.27,1061.27 7116.17,996.37 7116.17,951.34 7079.27,914.45 7079.27,910.3 J7.4@7114.58,875
ETH_B_P: J7.3 P1.5 | length 7313.9
  Top Layer 1 w5: P1.5@5460,1781.5 5460.37,1781.87 v1@5510,1781.87
  Layer 2 w5: v1(5510,1780) 5511.35,1780 5513.85,1782.5 5580,1782.5 5626.89,1782.5 5629.82,1779.57 5629.82,1691.29 5638.61,1682.5 5676.04,1682.5 5684.82,1691.29 5684.82,1782.5 5709.82,1782.5 5709.82,1691.29 5718.61,1682.5 5756.04,1682.5 5764.82,1691.29 5764.82,1782.5 5789.82,1782.5 5789.82,1691.29 5798.61,1682.5 5836.04,1682.5 5844.82,1691.29 5844.82,1782.5 5869.82,1782.5 5869.82,1691.29 5878.61,1682.5 5916.04,1682.5 5924.82,1691.29 5924.82,1782.5 5949.82,1782.5 5949.82,1691.29 5958.61,1682.5 5996.04,1682.5 6004.82,1691.29 6004.82,1782.5 6029.82,1782.5 6029.82,1691.29 6038.61,1682.5 6076.04,1682.5 6084.82,1691.29 6084.82,1782.5 6109.82,1782.5 6109.82,1691.29 6118.61,1682.5 6156.04,1682.5 6164.82,1691.29 6164.82,1782.5 6189.82,1782.5 6189.82,1691.29 6198.61,1682.5 6236.04,1682.5 6244.82,1691.29 6244.82,1779.57 6247.75,1782.5 6308.83,1782.5 6320,1771.33 6415.67,1675.67 6420.54,1670.79 6424.93,1666.4 6441.5,1666.4 6494.83,1719.72 6512.51,1702.05 6386.4,1575.94 6386.4,1563.51 6412.86,1537.05 6425.29,1537.05 6551.4,1663.16 6569.08,1645.48 6476.85,1553.25 6476.85,1540.83 6503.31,1514.36 6515.74,1514.36 6607.97,1606.59 6625.64,1588.91 6499.53,1462.8 6499.53,1450.37 6526,1423.91 6538.43,1423.91 6664.53,1550.02 6682.21,1532.34 6556.1,1406.23 6556.1,1393.81 6582.57,1367.34 6594.99,1367.34 6721.1,1493.45 6738.78,1475.77 6612.67,1349.66 6612.67,1337.24 6639.14,1310.77 6651.56,1310.77 6777.67,1436.88 6795.35,1419.21 6669.24,1293.1 6669.24,1280.67 6695.7,1254.2 6708.13,1254.2 6834.24,1380.31 6851.92,1362.64 6725.81,1236.53 6725.81,1224.1 6752.27,1197.64 6764.7,1197.64 6890.81,1323.75 6908.49,1306.07 6782.38,1179.96 6782.38,1167.53 6808.84,1141.07 6821.27,1141.07 6947.38,1267.18 6965.05,1249.5 6838.94,1123.39 6838.94,1110.96 6865.41,1084.5 6877.84,1084.5 7003.94,1210.61 7021.62,1192.93 6895.51,1066.82 6895.51,1054.4 6921.98,1027.93 6934.4,1027.93 7060.51,1154.04 7078.19,1136.36 7024.86,1083.04 7024.86,1066.47 7035.79,1055.54 7040.67,1050.67 7101.17,990.16 7101.17,957.56 7072.64,929.02 7068.49,929.02 7064.58,932.94 J7.3@7064.58,975
ETH_C_N: J7.8 P1.11 | length 9345
  Top Layer 1 w5: P1.11@5460,1828.74 5460.37,1828.37 5520.52,1828.37 5523.89,1825 v1(5540,1825)
  Bottom Layer 1 w5: v1(5540,1825) 5560,1825 5566.89,1825 5569.82,1827.93 5569.82,1916.21 5578.61,1925 5616.04,1925 5624.82,1916.21 5624.82,1764.36 5649.82,1764.36 5649.82,1916.21 5658.61,1925 5696.04,1925 5704.82,1916.21 5704.82,1764.36 5729.82,1764.36 5729.82,1916.21 5738.61,1925 5776.04,1925 5784.82,1916.21 5784.82,1764.36 5809.82,1764.36 5809.82,1916.21 5818.61,1925 5856.04,1925 5864.82,1916.21 5864.82,1764.36 5889.82,1764.36 5889.82,1916.21 5898.61,1925 5936.04,1925 5944.82,1916.21 5944.82,1764.36 5969.82,1764.36 5969.82,1916.21 5978.61,1925 6016.04,1925 6024.82,1916.21 6024.82,1764.36 6049.82,1764.36 6049.82,1916.21 6058.61,1925 6096.04,1925 6104.82,1916.21 6104.82,1764.36 6129.82,1764.36 6129.82,1916.21 6138.61,1925 6176.04,1925 6184.82,1916.21 6184.82,1764.36 6209.82,1764.36 6209.82,1916.21 6218.61,1925 6256.04,1925 6264.82,1916.21 6264.82,1732.5 6289.82,1732.5 6289.82,1916.21 6298.61,1925 6336.04,1925 6344.82,1916.21 6344.82,1801.39 6370,1776.21 6460.61,1685.61 6465.48,1680.73 6469.62,1680.73 6532.05,1743.16 6544.48,1743.16 6570.94,1716.69 6570.94,1704.27 6435.73,1569.06 6453.41,1551.38 6588.62,1686.59 6601.04,1686.59 6627.51,1660.13 6627.51,1647.7 6511.77,1531.96 6529.45,1514.28 6645.19,1630.02 6657.61,1630.02 6684.08,1603.56 6684.08,1591.13 6568.34,1475.39 6586.02,1457.71 6701.76,1573.45 6714.18,1573.45 6740.65,1546.99 6740.65,1534.56 6624.91,1418.82 6642.58,1401.15 6758.32,1516.88 6770.75,1516.88 6797.21,1490.42 6797.21,1477.99 6681.47,1362.25 6699.15,1344.58 6814.89,1460.32 6827.32,1460.32 6853.78,1433.85 6853.78,1421.43 6738.04,1305.69 6755.72,1288.01 6871.46,1403.75 6883.89,1403.75 6910.35,1377.28 6910.35,1364.86 6794.61,1249.12 6812.29,1231.44 6928.03,1347.18 6940.45,1347.18 6966.92,1320.71 6966.92,1308.29 6848.07,1189.44 6865.75,1171.77 6984.6,1290.61 6997.02,1290.61 7023.49,1264.15 7023.49,1251.72 6888.28,1116.51 6905.96,1098.83 7041.17,1234.04 7053.59,1234.04 7080.06,1207.58 7080.06,1195.15 6944.85,1059.94 6962.53,1042.27 7097.73,1177.47 7110.16,1177.47 7136.62,1151.01 7136.62,1138.58 7045.42,1047.38 7063.1,1029.7 7154.3,1120.91 7166.73,1120.91 7193.19,1094.44 7193.19,1082.02 7130.77,1019.59 7130.77,1015.45 7134.05,1012.16 7138.93,1007.29 7139.95,1006.26 7144.09,1006.26 7149.42,1011.59 7179.74,1011.59 7201.17,990.16 7201.17,959.84 7195.84,954.51 7195.84,950.37 7219.62,926.59 7265.95,926.59 7295.37,897.17 7295.37,888.89 7295.37,888 7295.37,883.01 7294.04,881.68 ccw(c7314.58,875) 7293.39,870.85 7294.54,869.69 7296.01,868.23 7307.81,868.23 J7.8@7314.58,875